# Altium PCB PCB_Stepper-Spindle-Controller_2024-04-30.pcbdoc
Units mm, origin at the board's own origin, x right, y up, seen from the top; angles counter-clockwise.
Board outline 76.8 x 65.69 mm, 2 copper layers (Top Layer, Bottom Layer); 30 components, 21 nets, 97 pads, 23 vias.
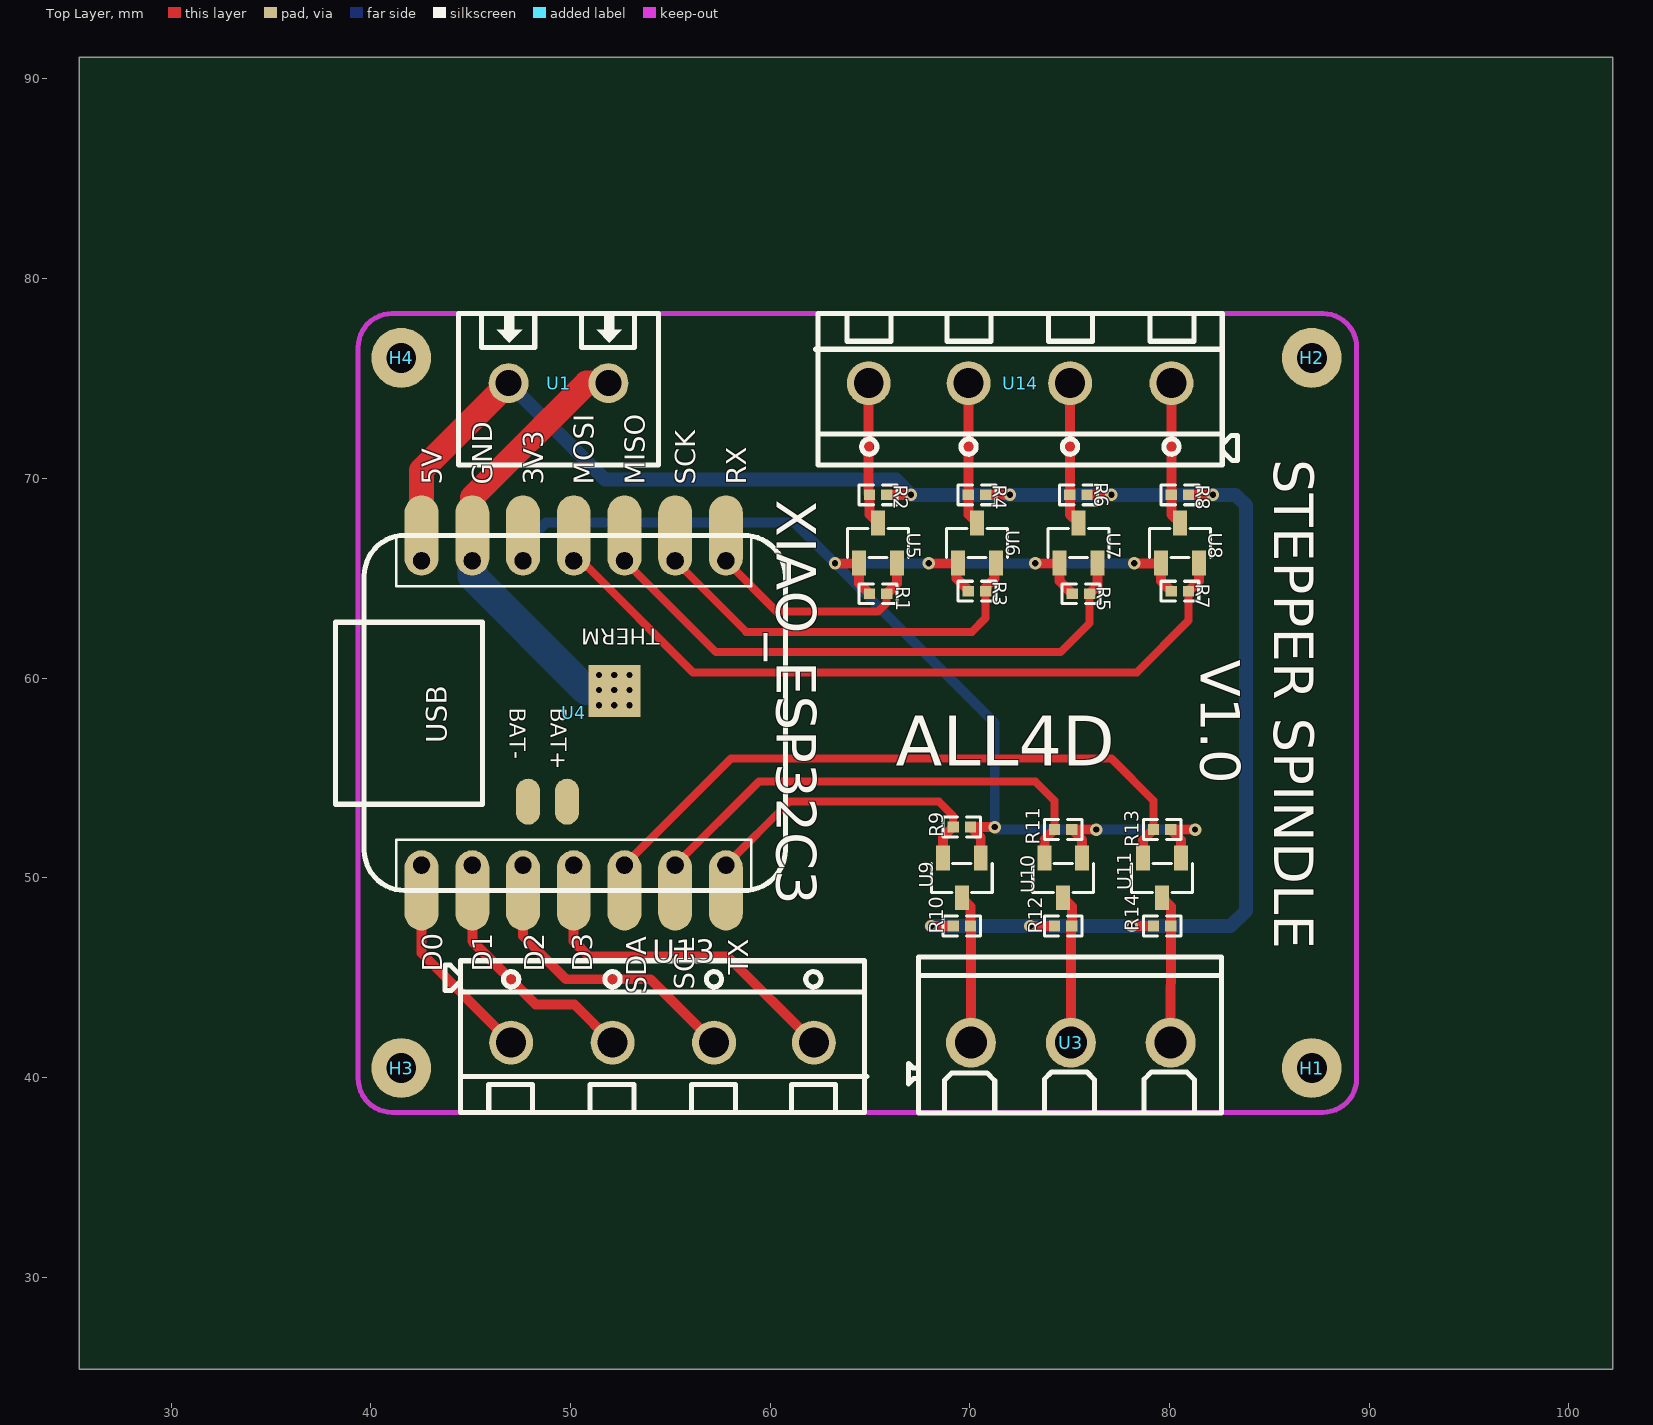
[diagram p0: Top Layer view]
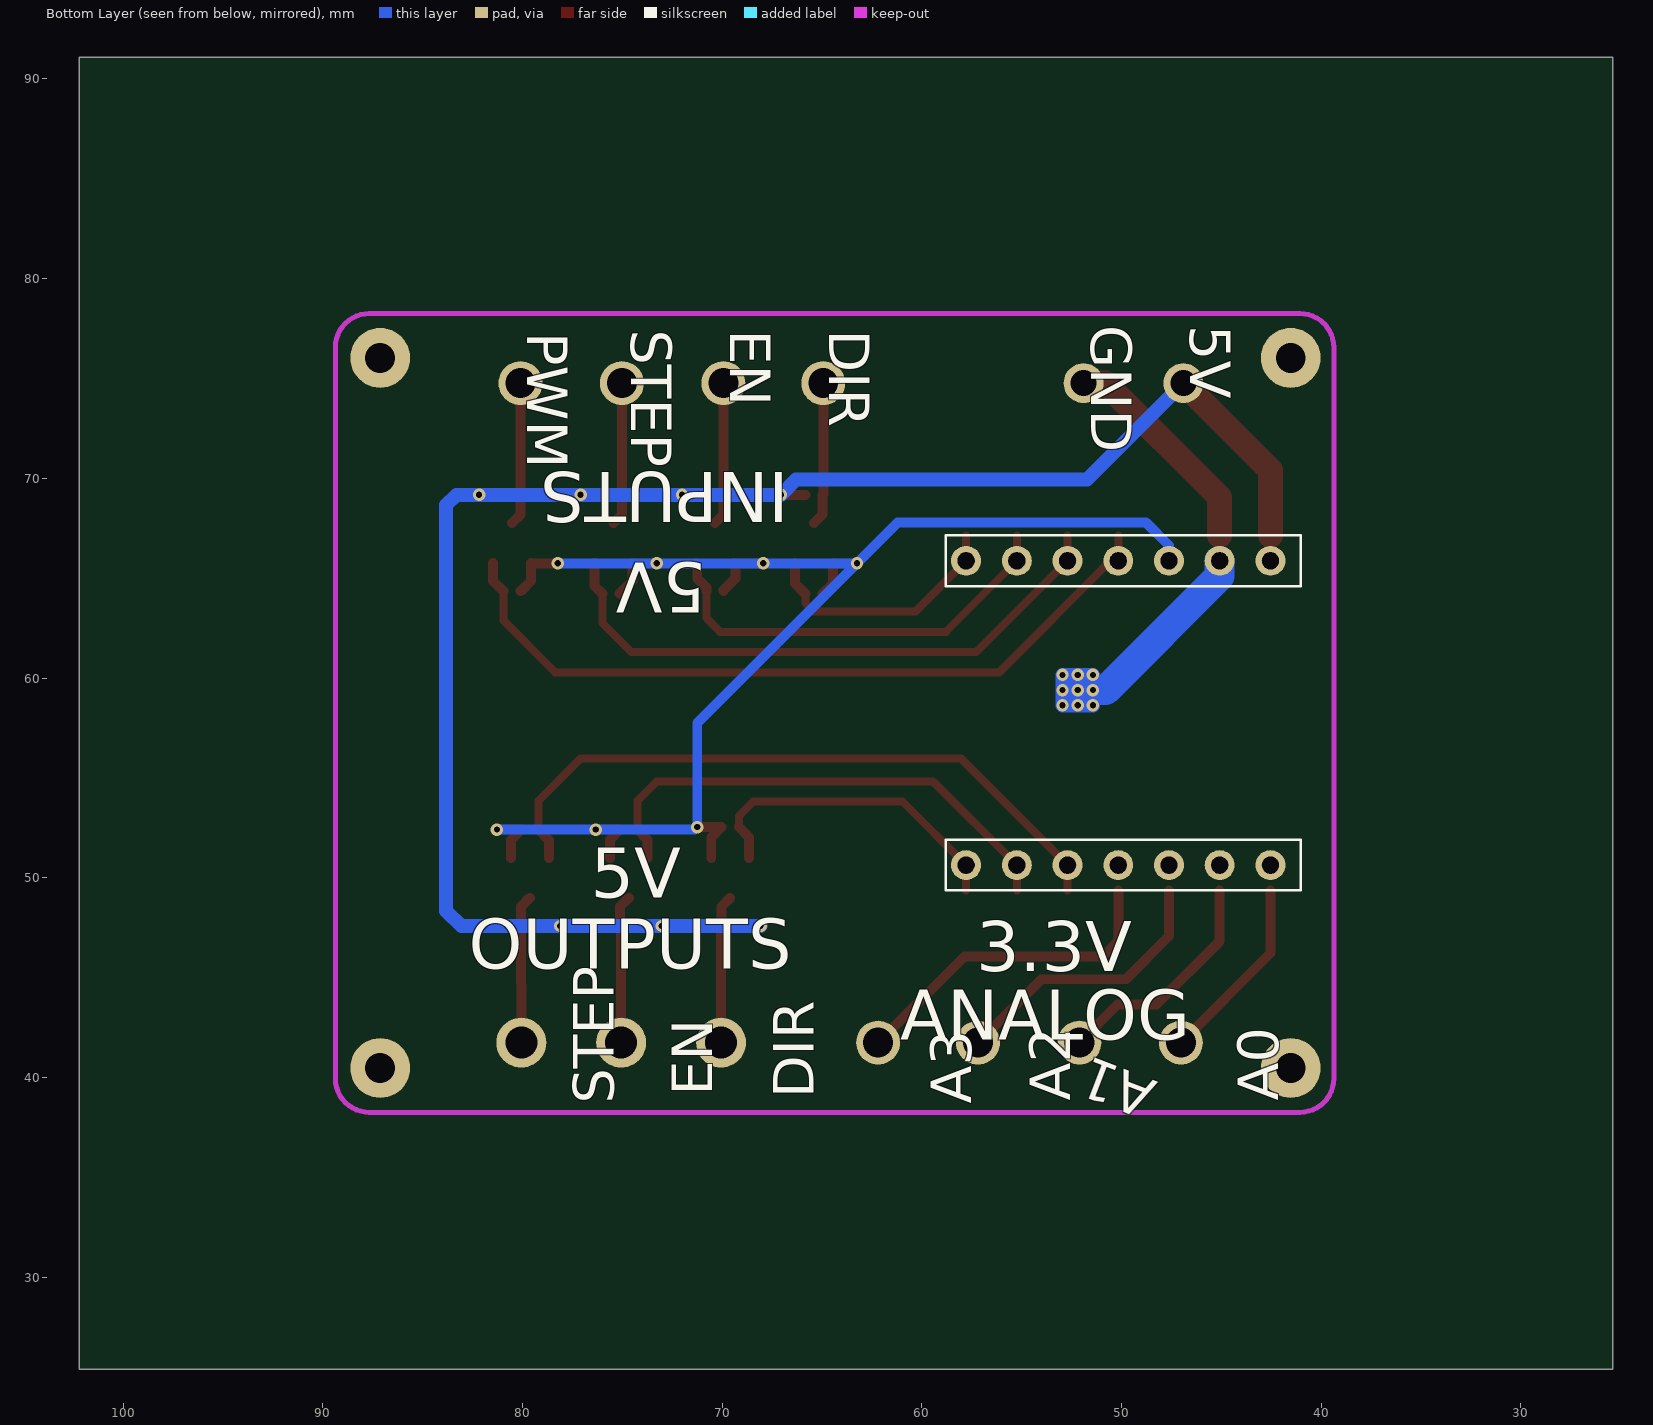
[diagram p1: Bottom Layer view, seen from below]

## Layer stack, top to bottom
Top Layer: signal copper (thickness not stored)
Dielectric: dielectric 0.32, FR-4, Dk 4.8
Bottom Layer: signal copper (thickness not stored)

## Board outline
102.197,25.4 25.4,25.4 25.4,91.093 102.197,91.093

## Components (designator, comment, footprint, x,y, rotation, side; value= is the part's Value field where it differs from the comment)
H1 "HOLE 3.4" HOLEHOLE 87.122,40.475 r0 top
H2 "HOLE 3.4" HOLEHOLE 87.122,76.035 r0 top
H3 "HOLE 3.4" HOLEHOLE 41.529,40.475 r0 top
H4 "HOLE 3.4" HOLEHOLE 41.529,76.035 r0 top
R1 "10kΩ" R0402 65.405,64.224 r180 top
R2 "10kΩ" R0402 65.405,69.177 r0 top
R3 "10kΩ" R0402 70.358,64.351 r180 top
R4 "10kΩ" R0402 70.358,69.177 r0 top
R5 "10kΩ" R0402 75.565,64.224 r180 top
R6 "10kΩ" R0402 75.438,69.177 r0 top
R7 "10kΩ" R0402 80.518,64.351 r180 top
R8 "10kΩ" R0402 80.518,69.177 r0 top
R9 "10kΩ" R0402 69.596,52.54 r0 top
R10 "10kΩ" R0402 69.596,47.587 r180 top
R11 "10kΩ" R0402 74.676,52.413 r0 top
R12 "10kΩ" R0402 74.676,47.587 r180 top
R13 "10kΩ" R0402 79.629,52.413 r0 top
R14 "10kΩ" R0402 79.629,47.587 r180 top
U1 "DB301V-5.0-2P" CONN-TH_2P-P5.00_L7.6-W10.0 49.403,74.765 r180 top
U3 "DB301V-5.0-3P" CONN-TH_DB301V-5.0-3P 75.057,41.745 r0 top
U4 "XIAO_ESP32C3" XIAO-ESP32-C3 50.165,58.255 r180 top
U5 "BSS138IXTSA1" SOT-23-3_L2.9-W1.3-P1.90-LS2.4-BR 65.405,66.764 r270 top
U6 "BSS138IXTSA1" SOT-23-3_L2.9-W1.3-P1.90-LS2.4-BR 70.358,66.764 r270 top
U7 "BSS138IXTSA1" SOT-23-3_L2.9-W1.3-P1.90-LS2.4-BR 75.438,66.764 r270 top
U8 "BSS138IXTSA1" SOT-23-3_L2.9-W1.3-P1.90-LS2.4-BR 80.518,66.764 r270 top
U9 "BSS138IXTSA1" SOT-23-3_L2.9-W1.3-P1.90-LS2.4-BR 69.596,50 r90 top
U10 "BSS138IXTSA1" SOT-23-3_L2.9-W1.3-P1.90-LS2.4-BR 74.676,50 r90 top
U11 "BSS138IXTSA1" SOT-23-3_L2.9-W1.3-P1.90-LS2.4-BR 79.629,50 r90 top
U13 "JL301-50004U01" CONN-TH_JL301-50004U01 54.61,41.745 r0 top
U14 "JL301-50004U01" CONN-TH_JL301-50004U01 72.517,74.765 r180 top

## Footprints (in the part's own frame and the unit in brackets; to place one, negate y for a bottom-side part, rotate by r counter-clockwise, add the part's x,y. Pads: shape width x height; smd on the part's side, far side on the other; paste and mask are expansions set on the pad)
CONN-TH_2P-P5.00_L7.6-W10.0 [mm]
  round 2 hole 1.3 paste+0 mask+0.051: 1(-2.5,0) 2(2.5,0)
  silkscreen extent -5,-3.56 5,4.1
CONN-TH_DB301V-5.0-3P [mm]
  round 2.5 hole 1.6 paste+0 mask+0.051: 1(-5,0) 2(0,0) 3(5,0)
  silkscreen extent -8.13,-3.52 7.54,4.28
CONN-TH_JL301-50004U01 [mm]
  round 2.2 hole 1.5 paste+0 mask+0.051: 1(-7.58,0) 2(-2.5,0) 3(2.58,0) 4(7.58,0)
  silkscreen extent -10.88,-3.5 10.24,4.1
HOLEHOLE [mm]
  round 3 hole 1.5 paste+0 mask+0.102: 1(0,0)
R0402 [mm]
  rect 0.566x0.54 smd paste-100 mask+0.051: 1(-0.433,0) 2(0.433,0)
  silkscreen extent -0.94,-0.5 0.94,0.5
SOT-23-3_L2.9-W1.3-P1.90-LS2.4-BR [mm]
  rect 1.25x0.7 smd paste+0 mask+0.051: 1(1,-0.95) 2(1,0.95) 3(-1,0)
  silkscreen extent -0.73,-1.53 0.73,1.53
XIAO-ESP32-C3 [mm]
  round 1.5 hole 0.85 slot 0.855 at 90 deg paste+0 mask+0.051: 0(7.62,7.62) 1(5.08,7.62) 2(2.54,7.62) 3(0,7.62) 3V3(2.54,-7.62) 4(-2.54,7.62) 5(-5.08,7.62) 5V(7.62,-7.62) 6(-7.62,7.62) 7(-7.62,-7.62) 8(-5.08,-7.62) 9(-2.54,-7.62) 10(0,-7.62) GND(5.08,-7.62)
  oval 1.7x4 smd paste+0 mask+0.051: 0(7.62,8.89) 1(5.08,8.89) 2(2.54,8.89) 3(0,8.89) 3V3(2.54,-8.89) 4(-2.54,8.89) 5(-5.08,8.89) 5V(7.62,-8.89) 6(-7.62,8.89) 7(-7.62,-8.89) 8(-5.08,-8.89) 9(-2.54,-8.89) 10(0,-8.89) GND(5.08,-8.89)
  oval 1.2x2.3 smd paste+0 mask+0.051: 11(0.336,4.445) 12(2.286,4.445)
  rect 2.6x2.6 smd paste+0 mask+0.051: GND(-2.046,-1.1)
  silkscreen extent -10.61,-8.89 11.94,8.89

## Via types
v1: diameter 0.62, hole 0.31, Top Layer to Bottom Layer, tented both sides, 23 vias

## Nets (pads, with @x,y where several pads share a name; then routed paths per layer and width w, separated by ;. In a path a pad name is that pad's centre, name@x,y a point inside that pad or via, vN(x,y) a via of type N, cw(c..) or ccw(c..) an arc to the next point about the centre after c; other vN are vias at no path point)
+5V: R2.2 R4.2 R6.2 R8.2 R10.2 R12.2 R14.2 U1.2 U4.5V | length 93.5
  Top Layer w0.5: R2.2 v1(67.056,69.177) ; v1(68.072,47.587) R10.2 ; R4.2 v1(72.009,69.177) ; v1(73.025,47.587) R12.2 ; R6.2 v1(77.089,69.177) ; v1(78.105,47.587) R14.2 ; R8.2 v1(82.169,69.177)
  Top Layer w1.25: U4.5V@42.545,67.145 42.545,70.407 U1.2
  Bottom Layer w0.7: U1.2 51.73,69.939 66.294,69.939 v1(67.056,69.177) v1(82.169,69.177) 83.312,69.177 83.82,68.669 83.82,48.349 83.058,47.587 v1(78.105,47.587) v1(68.072,47.587)
A0: U4.0 U13.1 | length 9.5
  Top Layer w0.5: U4.0@42.545,49.365 42.545,46.23 U13.1
A1: U4.1 U13.2 | length 11.7
  Top Layer w0.5: U4.1@45.085,49.365 45.085,46.825 48.26,43.65 50.205,43.65 U13.2
A2: U4.2 U13.3 | length 14.1
  Top Layer w0.5: U4.2@47.625,49.365 47.625,47.079 49.784,44.92 54.016,44.92 U13.3
A3: U4.3 U13.4 | length 16.7
  Top Layer w0.5: U4.3@50.165,49.365 50.165,46.825 50.927,46.063 57.872,46.063 U13.4
DIR3VIN: R1.1 U4.7 U5.2 | length 12.8
  Top Layer w0.4: U4.7@57.785,67.145 57.785,65.875 60.325,63.335 65.405,63.335 65.837,63.767 R1.1
  Top Layer w0.5: R1.1 66.355,64.742 U5.2
DIR3VOUT: R9.1 U4.6 U9.2 | length 16.6
  Top Layer w0.4: U4.6@57.785,49.365 57.785,50.635 60.96,53.81 68.453,53.81 69.164,53.099 R9.1
  Top Layer w0.5: U9.2 68.646,52.023 R9.1
DIR5VIN: R2.1 U5.3 U14.4 | length 7.2
  Top Layer w0.5: U14.4 64.937,69.213 R2.1 64.972,68.197 U5.3
DIR5VOUT: R10.1 U3.1 U9.3 | length 7.4
  Top Layer w0.5: U9.3@69.596,49 70.029,48.568 R10.1 70.057,47.559 U3.1@70.057,41.745
EN3VIN: R3.1 U4.8 U6.2 | length 21.5
  Top Layer w0.4: U4.8@55.245,67.145 55.245,65.875 58.801,62.319 70.104,62.319 70.79,63.005 R3.1
  Top Layer w0.5: R3.1 70.791,64.53 71.247,64.986 71.247,65.703 U6.2
EN3VOUT: R11.1 U4.5 U10.2 | length 25.5
  Top Layer w0.4: U4.5@55.245,49.365 55.245,50.635 59.436,54.826 73.279,54.826 74.244,53.861 R11.1
  Top Layer w0.5: U10.2 73.726,51.896 R11.1
EN5VIN: R4.1 U6.3 U14.3 | length 7.2
  Top Layer w0.5: R4.1 69.925,68.197 U6.3 ; R4.1 U14.3
EN5VOUT: R12.1 U3.2 U10.3 | length 7.5
  Top Layer w0.5: U10.3 75.109,48.568 R12.1 75.057,47.536 U3.2
GND: U1.1 U4.GND | length 29.7
  Top Layer w1.25: U4.GND@45.085,67.145 45.085,69.05 50.8,74.765 U1.1
  Bottom Layer w0.7: v1(52.197,58.636) v1(52.197,60.16) ; v1(52.197,59.398) v1(52.959,59.398) ; v1(51.435,58.636) v1(51.435,60.16) v1(52.959,60.16) v1(52.959,58.636) v1(51.435,58.636)
  Bottom Layer w1.5: U4.GND@45.085,65.875 45.085,65.113 50.8,59.398 v1(52.197,59.398)
  other v1: 51.435,59.398
PWM3VIN: R7.1 U4.10 U8.2 | length 38.6
  Top Layer w0.4: U4.10@50.165,67.145 50.165,65.748 50.673,65.748 56.134,60.287 78.359,60.287 80.95,62.878 R7.1
  Top Layer w0.5: R7.1 81.468,64.869 U8.2
PWM5VIN: R8.1 U8.3 U14.1 | length 7.2
  Top Layer w0.5: R8.1 80.085,68.197 U8.3 ; R8.1 U14.1
STEP3VIN: R5.1 U4.9 U7.2 | length 30.2
  Top Layer w0.4: U4.9@52.705,67.145 52.705,65.875 57.277,61.303 74.549,61.303 75.997,62.751 R5.1
  Top Layer w0.5: R5.1 76.388,64.615 U7.2
STEP3VOUT: R13.1 U4.4 U11.2 | length 33.9
  Top Layer w0.4: U4.4@52.705,49.365 52.705,50.635 58.039,55.969 77.089,55.969 79.197,53.861 R13.1
  Top Layer w0.5: U11.2 78.679,51.896 R13.1
STEP5VIN: R6.1 U7.3 U14.2 | length 7.2
  Top Layer w0.5: R6.1 75.005,68.197 U7.3 ; R6.1 U14.2
STEP5VOUT: R14.1 U3.3 U11.3 | length 7.4
  Top Layer w0.5: U11.3 80.062,48.568 R14.1 ; U3.3@80.058,41.745 R14.1
VCC: R1.2 R3.2 R5.2 R7.2 R9.2 R11.2 R13.2 U4.3V3 U5.1 U6.1 U7.1 U8.1 U9.1 U10.1 U11.1 | length 80.1
  Top Layer w0.5: v1(63.246,65.748) 64.439,65.748 U5.1 64.455,64.742 R1.2 ; v1(67.945,65.748) 69.392,65.748 U6.1 69.342,65.698 69.342,64.986 69.925,64.403 R3.2 ; U9.1 70.546,52.023 R9.2 v1(71.247,52.54) ; v1(73.279,65.748) 74.472,65.748 U7.1 74.488,64.869 R5.2 ; U10.1 75.626,51.896 R11.2 v1(76.327,52.413) ; v1(78.232,65.748) 79.552,65.748 U8.1 79.568,64.869 R7.2 ; U11.1 80.579,51.896 R13.2 v1(81.28,52.413)
  Bottom Layer w0.5: U4.3V3@47.625,65.875 47.625,66.637 48.768,67.78 61.214,67.78 v1(63.246,65.748) ; v1(78.232,65.748) v1(63.246,65.748) ; v1(81.28,52.413) 71.374,52.413 v1(71.247,52.54) 71.247,57.747 v1(63.246,65.748)
pads on no net: H1.1 H2.1 H3.1 H4.1 U4.11 U4.12

## Keep-outs
Keep-Out Layer:
  lines w0.254: 39.37,39.955 ccw(c41.07,39.955) 41.07,38.255 ; 39.37,76.555 cw(c41.07,76.555) 41.07,78.255 ; 87.67,38.255 ccw(c87.67,39.955) 89.37,39.955 ; 87.67,78.255 cw(c87.67,76.555) 89.37,76.555

## Silkscreen, mask and mechanical layers (free items; w line width, h text height)
Top Overlay:
  text "STEPPER SPINDLE" at 85.233,70.955 h2 r270
  text "XIAO_ESP32C3" at 60.341,68.923 h2 r270
  text "V1.0" at 81.55,60.922 h2 r270
  text "ALL4D" at 66.294,55.608 h2.5
Bottom Overlay:
  text "5V" at 46.562,77.657 h2.03 r90
  text "GND" at 51.515,77.657 h2.03 r90
  text "DIR" at 64.643,77.432 h2.03 r90
  text "EN" at 69.596,77.432 h2.03 r90
  text "STEP" at 74.549,77.432 h2.03 r90
  text "PWM" at 79.756,77.305 h2.03 r90
  text "INPUTS" at 66.675,70.3 h2.5 r180
  text "5V" at 70.791,65.78 h2.5 r180
  text "5V" at 76.581,49.004 h2.5
  text "OUTPUTS" at 82.677,45.448 h2.5
  text "3.3V" at 57.277,45.321 h2.5
  text "ANALOG" at 61.087,41.892 h2.5
  text "A1" at 48.15,39.773 h2.03 r201
  text "EN" at 70.485,39.078 h2.03 r270
  text "DIR" at 65.405,38.951 h2.03 r270
  text "A0" at 42.164,38.824 h2.03 r270
  text "A2" at 52.578,38.824 h2.03 r270
  text "A3" at 57.531,38.697 h2.03 r270
  text "STEP" at 75.438,38.697 h2.03 r270

## Text inside footprints (layer, text, board x,y; h text height)
U4: Document "GND" at 43.815,63.234 h0.71; Document "5V" at 41.783,63.234 h0.71; Document "5" at 54.991,52.515 h0.71 r180; Document "3V3" at 46.609,63.234 h0.71; Document "10" at 49.657,63.234 h0.71; Document "7" at 57.463,63.938 h0.71 r191; Document "8" at 54.991,63.945 h0.71 r180; Document "9" at 52.42,63.944 h0.71 r185; Document "0" at 42.291,52.515 h0.71 r180; Document "1" at 44.831,52.515 h0.71 r180; Document "6" at 57.754,52.514 h0.71 r185; Document "2" at 47.371,52.007 h0.71 r180; Document "3" at 49.911,52.007 h0.71 r180; Document "4" at 52.655,52.451 h0.71 r145; Top Overlay "USB" at 43.815,56.731 h1.02 r90; Top Overlay "SDA" at 53.793,44.201 h1 r90; Top Overlay "SCL" at 56.193,44.401 h1 r90; Top Overlay "TX" at 58.893,45.147 h1 r90; Top Overlay "D3" at 51.093,45.301 h1 r90; Top Overlay "D2" at 48.693,45.301 h1 r90; Top Overlay "D0" at 43.593,45.301 h1 r90; Top Overlay "D1" at 46.093,45.301 h1 r90; Top Overlay "MISO" at 53.713,69.685 h1 r90; Top Overlay "SCK" at 56.253,69.685 h1 r90; Top Overlay "RX" at 58.793,69.685 h1 r90; Top Overlay "MOSI" at 51.173,69.685 h1 r90; Top Overlay "3V3" at 48.633,69.685 h1 r90; Top Overlay "5V" at 43.553,69.685 h1 r90; Top Overlay "GND" at 46.093,69.685 h1 r90; Top Overlay "BAT-" at 46.971,58.509 h0.8 r270; Top Overlay "BAT+" at 49.003,58.509 h0.8 r270; Top Overlay "THERM" at 54.483,62.465 h0.8 r180